# Altium PCB Space_OUT.PcbDoc (part 2 of 3)
Units mm, origin at the board's own origin, x right, y up, seen from the top; angles counter-clockwise.
Board outline 300 x 100 mm, 4 copper layers (Top Layer, MidLayer1, MidLayer2, Bottom Layer); 157 components, 49 nets, 745 pads, 302 vias.
Unrouted connection lines stored in the file: 3.
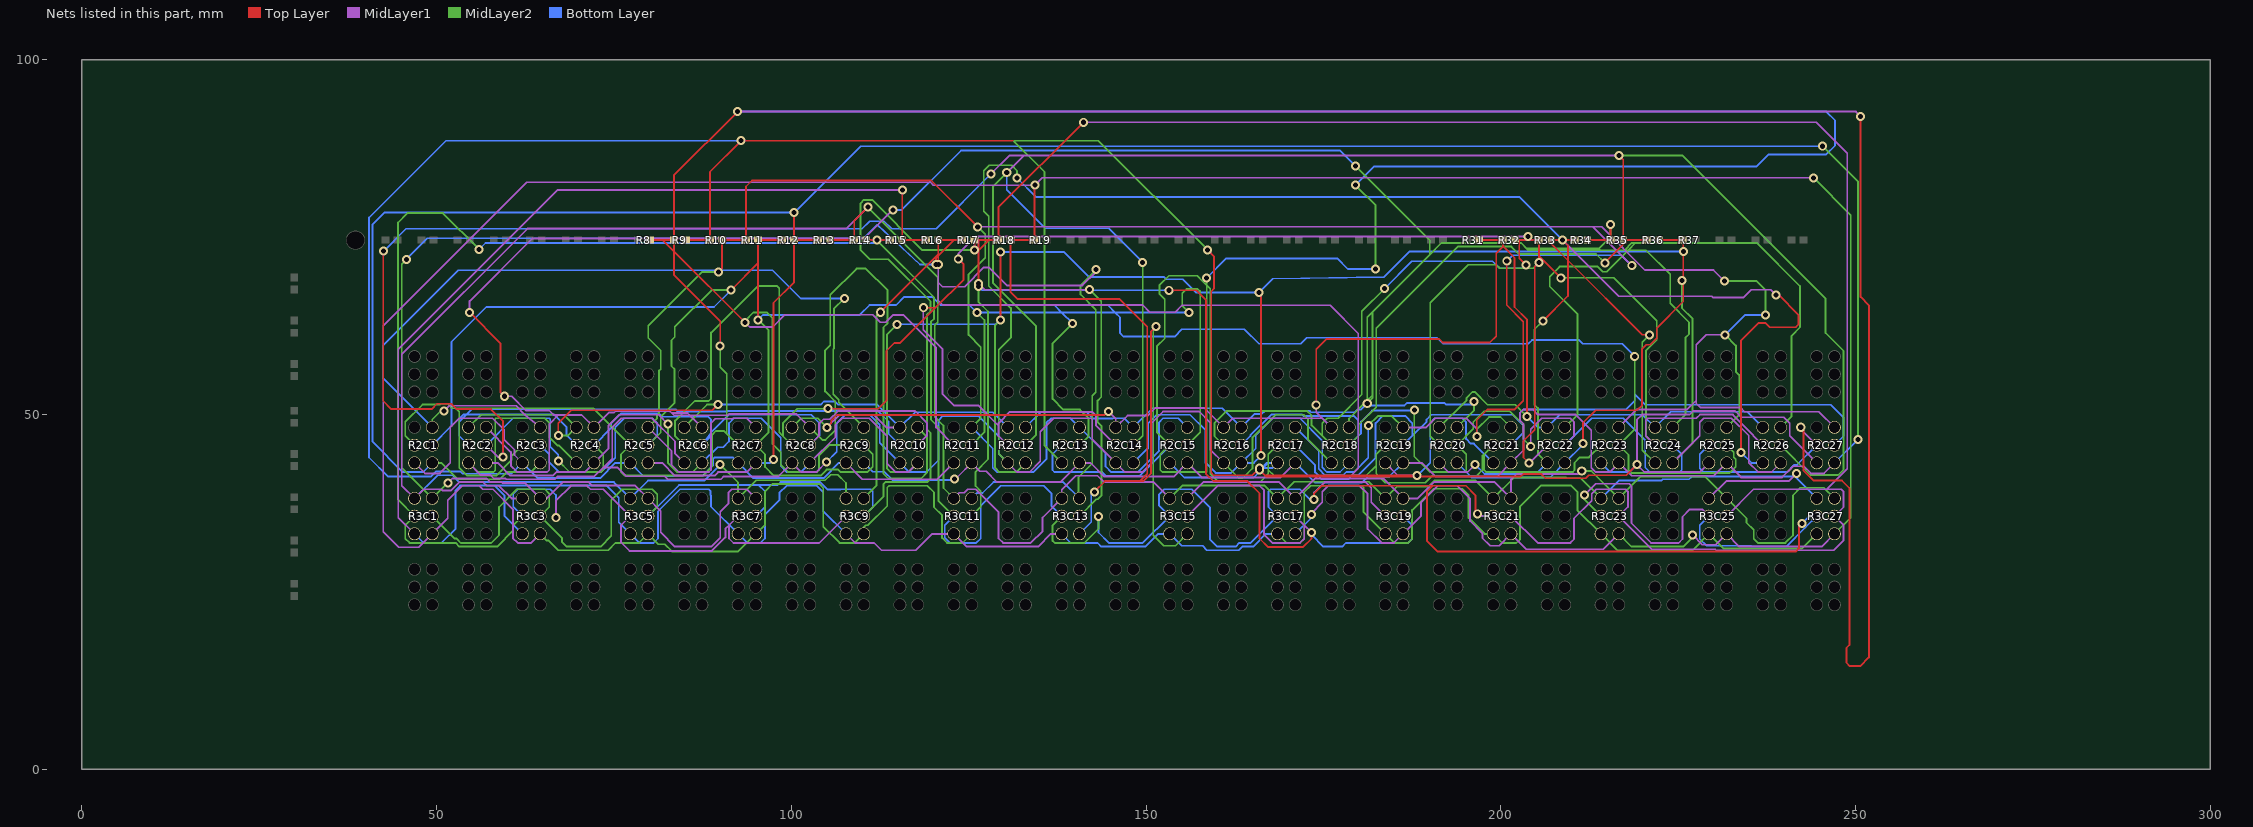
[diagram p4: the nets of this part, all layers, seen from the top]

## Via types
v1: diameter 1.27, hole 0.711, Top Layer to Bottom Layer, 302 vias

## Nets (pads, with @x,y where several pads share a name; then routed paths per layer and width w, separated by ;. In a path a pad name is that pad's centre, name@x,y a point inside that pad or via, vN(x,y) a via of type N, cw(c..) or ccw(c..) an arc to the next point about the centre after c; other vN are vias at no path point) (continued)
NetR2C1_2: R2C1.2 R2C3.2 R2C5.2 R2C7.2 R2C9.2 R2C11.2 R2C13.2 R2C15.2 R2C17.2 R2C19.2 R2C21.2 R2C23.2 R2C25.2 R2C27.2 R8.2 R9.2 | length 1033.7
  Top Layer w0.254: v1(89.992,59.665) 89.992,63.146 83.478,69.66 83.478,72.986 ; v1(92.456,92.659) 83.478,83.681 R9.2@83.478,74.549 ; v1(242.265,48.184) 242.67,47.779 242.67,42.064 244.069,40.665 248.082,40.665 249.123,39.624 249.123,17.501 248.717,17.094 248.717,14.986 249.174,14.529 250.647,14.529 251.866,15.748 251.866,65.38 250.698,66.548 v1(250.698,91.999) ; 81.915,74.549 83.478,72.986 ; 81.915,74.549 R9.2@83.478,74.549 ; 81.915,74.549 R8.2@80.098,74.549 81.915,74.549 ; 83.478,72.986 v1(93.523,62.941) 83.478,72.986 ; 83.478,72.986 R9.2@83.478,74.549 ; 83.478,72.986 R9.2@83.478,74.549
  MidLayer1 w0.254: v1(92.456,92.659) 250.038,92.659 v1(250.698,91.999) ; v1(93.523,62.941) 94.158,62.306 97.384,62.306 99.111,64.033 111.488,64.033 112.529,62.992 113.342,62.992 114.358,64.008 115.78,64.008 120.421,59.367 120.421,48.164 R2C11.2@122.924,45.661 ; v1(242.265,48.184) 242.265,47.92 R2C27.2@244.524,45.661
  MidLayer2 w0.254: R2C1.2@46.924,45.661 45.618,46.967 45.618,48.946 48.045,51.372 50.5,51.372 50.614,51.486 51.605,51.486 52.227,50.864 ; R2C3.2@62.124,45.661 60.63,44.167 60.63,43.582 58.42,41.372 54.356,41.372 53.238,42.49 53.238,50.368 52.743,50.864 ; v1(89.992,59.665) 89.992,56.632 90.922,55.703 90.922,47.263 ; v1(93.523,62.941) 93.523,63.195 94.691,64.364 96.571,64.364 97.333,63.602 97.333,45.851 98.527,44.657 98.527,42.921 99.568,41.88 103.632,41.88 103.905,42.153 103.905,44.196 105.37,45.661 R2C9.2@107.724,45.661 ; v1(158.547,69.215) 158.547,68.195 ; R2C17.2@168.524,45.661 167.234,44.371 ; v1(179.502,82.296) 182.347,79.451 v1(182.347,70.485) ; R2C19.2@183.724,45.661 182.433,44.37 ; R2C23.2@214.124,45.661 212.405,43.942 211.15,43.942 210.388,43.18 210.388,42.139 210.109,41.859 197.942,41.859 197.637,42.164 197.637,44.374 ; 52.227,50.864 52.743,50.864 ; 52.227,50.864 52.743,50.864 ; 52.743,50.864 72.121,50.864 R2C5.2@77.324,45.661 76.022,44.359 76.022,41.859 76.509,41.372 87.575,41.372 88.875,42.672 88.875,47.142 89.408,47.676 90.509,47.676 90.922,47.263 ; 90.922,47.263 R2C7.2@92.524,45.661 90.922,47.263 ; 158.547,68.195 158.037,68.705 157.197,69.545 153.238,69.545 151.892,68.199 151.892,66.98 152.629,66.243 152.629,60.687 151.535,59.593 151.535,47.45 R2C15.2@153.324,45.661 152.019,44.356 152.019,42.164 152.324,41.859 158.471,41.859 158.547,41.935 158.547,68.195 ; 158.547,68.195 159.055,67.687 159.055,41.656 160.249,40.462 166.065,40.462 167.234,41.631 167.234,42.164 ; 167.234,42.164 168.046,41.351 181,41.351 182.433,42.783 ; 167.234,42.164 167.234,44.371 ; 167.234,42.164 167.234,44.371 ; 182.433,42.783 182.433,44.37 ; 182.433,42.783 182.433,41.646 183.718,40.361 189.324,40.361 190.264,41.3 196.545,41.3 197.409,42.164 197.409,44.146 197.637,44.374 ; 182.433,42.783 182.433,44.37 ; 197.637,44.374 R2C21.2@198.924,45.661 197.637,44.374
  Bottom Layer w0.254: v1(92.456,92.659) 245.872,92.659 247.091,91.44 247.091,87.859 245.872,86.639 237.744,86.639 236.017,84.912 182.118,84.912 v1(179.502,82.296) ; R2C13.2@138.124,45.661 136.83,44.367 136.83,42.164 137.135,41.859 143.815,41.859 144.323,41.351 149.123,41.351 152.705,44.933 152.705,45.661 R2C15.2@153.324,45.661 ; v1(158.547,69.215) 161.315,71.984 176.936,71.984 178.435,70.485 v1(182.347,70.485) ; R2C25.2@229.324,45.661 228.041,44.378 228.041,42.418 228.6,41.859 240.36,41.859 241.372,42.871 241.734,42.871 R2C27.2@244.524,45.661
NetR2C1_3: R2C1.3 R2C3.3 R2C5.3 R2C7.3 R2C9.3 R2C11.3 R2C13.3 R2C15.3 R2C17.3 R2C19.3 R2C21.3 R2C23.3 R2C25.3 R2C27.3 R9.1 R10.1 | length 568
  Top Layer w0.254: R9.1@85.178,74.549 R10.1@88.558,74.549 88.558,84.189 v1(92.939,88.57) 131.293,88.57 ; v1(158.674,73.177) 159.563,72.288 159.563,67.691 159.182,67.31 159.182,41.758 159.512,41.427 164.998,41.427 165.862,42.291 v1(166.014,42.443) ; v1(188.214,41.377) 166.776,41.377 ; v1(219.177,42.926) 217.678,41.427 212.42,41.427 211.988,40.996 206.299,40.996 205.715,41.58 203.149,41.58 202.819,41.25 188.214,41.25 166.903,41.25 166.776,41.377 ; 166.776,41.377 v1(166.014,42.139) 166.776,41.377
  MidLayer1 w0.254: R2C1.3@46.924,43.161 48.404,41.681 50.495,41.681 51.968,43.155 51.968,48.184 53.238,49.454 57.912,49.454 59.563,47.803 59.563,46.431 61.011,44.983 61.011,44.274 R2C3.3@62.124,43.161 ; R2C9.3@107.724,43.161 110.042,40.843 120.606,40.843 R2C11.3@122.924,43.161 ; R2C19.3@183.724,43.161 185.508,41.377 v1(188.214,41.377) ; R2C25.3@229.324,43.161 228.022,41.859 220.243,41.859 v1(219.177,42.926) 219.177,49.225 219.913,49.962 226.593,49.962 227.101,50.47 233.02,50.47 233.883,49.606 239.878,49.606 240.716,48.768 240.716,46.969 R2C27.3@244.524,43.161
  MidLayer2 w0.254: R2C13.3@138.124,43.161 135.712,45.573 135.712,84.15 131.293,88.57 143.281,88.57 v1(158.674,73.177)
  Bottom Layer w0.254: v1(92.939,88.57) 51.359,88.57 40.513,77.724 40.513,43.917 43.205,41.224 49.2,41.224 49.911,41.935 53.416,41.935 53.721,41.631 60.594,41.631 R2C3.3@62.124,43.161 64.264,41.021 73.076,41.021 75.216,43.161 R2C5.3@77.324,43.161 79.185,41.3 87.485,41.3 88.976,42.792 88.976,43.688 89.23,43.942 91.743,43.942 R2C7.3@92.524,43.161 94.664,41.021 104.591,41.021 106.731,43.161 R2C9.3@107.724,43.161 ; R2C15.3@153.324,43.161 155.388,41.097 165.17,41.097 166.113,42.04 166.265,42.193 v1@166.516,42.443 ; v1(166.014,42.139) 166.167,42.291 v1@166.319,42.443 ; v1(166.014,42.443) v1@166.319,42.443 ; v1(188.214,41.377) 190.043,43.206 190.043,48.768 190.717,49.442 194.564,49.442 195.105,48.901 195.105,46.545 195.778,45.872 196.213,45.872 R2C21.3@198.924,43.161 ; R2C23.3@214.124,43.161 215.426,41.859 218.11,41.859 v1(219.177,42.926) ; v1@166.319,42.443 v1@166.516,42.443 ; v1@166.319,42.443 167.037,43.161 167.234,43.161 ; v1@166.516,42.443 167.806,42.443 R2C17.3@168.524,43.161 ; v1@166.516,42.443 167.234,43.161 ; 167.234,43.161 R2C17.3@168.524,43.161 ; 167.234,43.161 R2C17.3@168.524,43.161
NetR2C1_4: R2C1.4 R2C3.4 R2C5.4 R2C7.4 R2C9.4 R2C11.4 R2C13.4 R2C15.4 R2C17.4 R2C19.4 R2C21.4 R2C23.4 R2C25.4 R2C27.4 R10.2 R11.2 | length 733.4
  Top Layer w0.254: v1(89.75,70.053) 90.258,70.561 R10.2@90.258,74.549 R11.2@93.638,74.549 93.638,82.106 94.488,82.956 119.761,82.956 v1(126.289,76.429) ; v1(196.621,46.888) 196.621,49.2 198.12,50.698 201.955,50.698 203.175,51.918 203.175,63.068 200.838,65.405 v1(200.838,71.603)
  MidLayer1 w0.254: v1(51.105,50.47) 51.841,51.206 61.232,51.206 62.477,49.962 R2C3.4@64.624,48.161 ; R2C5.4@79.824,48.161 83.134,44.851 83.134,42.926 84.18,41.88 88.421,41.88 88.705,42.164 88.705,48.768 89.315,49.378 91.729,49.378 91.805,49.454 93.731,49.454 R2C7.4@95.024,48.161 ; R2C19.4@186.224,48.161 189.483,48.161 190.776,49.454 195.148,49.454 196.621,47.981 v1(196.621,46.888) ; R2C23.4@216.624,48.161 219.155,50.692 226.278,50.692 227.535,51.949 ; v1(218.453,70.955) 212.979,76.429 ; v1(231.521,68.783) 229.972,70.333 220.32,70.333 214.224,76.429 212.979,76.429 ; v1(231.597,61.214) 228.93,61.214 227.535,59.819 ; R2C27.4@247.024,48.161 244.829,50.356 234.335,50.356 233.713,50.978 228.092,50.978 227.535,51.535 227.535,51.949 ; 212.979,76.429 v1(126.289,76.429) 212.979,76.429 ; 227.535,51.949 227.535,59.819 ; 227.535,51.949 227.535,59.819
  MidLayer2 w0.254: R2C1.4@49.424,48.161 49.424,49.276 50.618,50.47 v1(51.105,50.47) ; R2C5.4@79.824,48.161 81.102,49.439 81.102,49.91 81.358,50.166 81.358,56.117 81.613,56.372 81.613,59.001 79.858,60.757 79.858,62.484 87.427,70.053 v1(89.75,70.053) ; v1(107.493,66.33) 106.02,64.857 106.02,59.237 105.935,59.152 105.935,52.832 106.705,52.062 106.705,51.68 R2C9.4@110.224,48.161 ; R2C11.4@125.424,48.161 126.721,49.458 126.721,59.461 124.993,61.189 124.993,69.723 127.342,72.072 127.342,75.375 v1(126.289,76.429) ; v1(181.331,48.438) 182.651,49.759 184.626,49.759 R2C19.4@186.224,48.161 ; v1(196.621,46.888) 196.621,47.904 198.349,49.632 199.953,49.632 R2C21.4@201.424,48.161 ; v1(231.521,68.783) 236.042,68.783 237.287,67.539 v1(237.287,63.983) ; v1(231.597,61.214) 233.121,59.69 233.121,56.02 233.613,55.529 233.613,49.95 R2C25.4@231.824,48.161
  Bottom Layer w0.254: R2C1.4@49.424,48.161 42.506,55.079 42.506,59.753 53.061,70.307 ; v1(89.75,70.053) v1@89.75,70.307 ; v1(107.493,66.33) 101.34,66.33 97.363,70.307 v1@89.75,70.307 ; R2C11.4@125.424,48.161 128.397,45.188 128.397,42.494 129.032,41.859 134.137,41.859 135.966,43.688 135.966,48.793 136.627,49.454 139.331,49.454 R2C13.4@140.624,48.161 144.297,44.488 144.297,42.672 145.11,41.859 148.844,41.859 151.841,44.856 151.841,48.883 152.4,49.442 154.543,49.442 R2C15.4@155.824,48.161 ; R2C17.4@171.024,48.161 174.335,44.85 174.335,42.314 175.277,41.372 177.719,41.372 178.227,41.88 179.324,41.88 181.331,43.887 v1(181.331,48.438) ; v1(200.838,71.603) 201.664,72.429 216.979,72.429 v1(218.453,70.955) ; v1(231.597,61.214) 234.366,63.983 v1(237.287,63.983) ; 53.061,70.307 v1@89.75,70.307 ; 53.061,70.307 v1@89.75,70.307
NetR2C1_5: R2C1.5 R2C3.5 R2C5.5 R2C7.5 R2C9.5 R2C11.5 R2C13.5 R2C15.5 R2C17.5 R2C19.5 R2C21.5 R2C23.5 R2C25.5 R2C27.5 R11.1 R12.1 | length 587.7
  Top Layer w0.254: v1(91.516,67.513) 95.338,71.335 ; v1(95.338,63.322) 95.338,71.335 ; R12.1@98.718,74.549 R11.1@95.338,74.549 ; 95.338,71.335 R11.1@95.338,74.549 ; 95.338,71.335 R11.1@95.338,74.549
  MidLayer2 w0.254: R2C5.5@79.824,45.661 81.61,47.447 81.61,49.658 83.566,51.614 83.566,56.372 83.135,56.803 83.135,60.449 83.591,60.905 83.591,62.319 88.786,67.513 v1(91.516,67.513) ; v1(95.338,63.322) 96.813,61.847 96.813,47.45 R2C7.5@95.024,45.661 96.316,44.369 96.316,42.592 97.536,41.372 104.14,41.372 104.983,42.215 106.645,42.215 107.001,41.859 110.744,41.859 111.506,42.621 111.506,44.379 R2C9.5@110.224,45.661 ; R2C11.5@125.424,45.661 127.229,47.466 127.229,63.297 v1(126.187,64.338) ; v1(139.649,62.814) 136.843,60.008 136.843,52.184 138.354,50.673 140.686,50.673 141.905,49.454 141.905,46.942 R2C13.5@140.624,45.661 ; R2C15.5@155.824,45.661 157.632,47.469 157.632,67.335 157.302,67.666 155.727,67.666 155.118,67.056 155.118,65.303 v1(156.083,64.338) ; 218.872,52.832 218.872,47.909 ; v1(218.872,58.166) 218.872,47.909 ; R2C25.5@231.824,45.661 232.816,44.669 232.816,43.98 233.105,43.692 233.105,42.63 232.232,41.758 218.415,41.758 218.008,42.164 218.008,44.277 R2C23.5@216.624,45.661 218.872,47.909
  Bottom Layer w0.254: R2C1.5@49.424,45.661 52.121,48.358 52.121,60.198 57.048,65.126 89.129,65.126 v1(91.516,67.513) ; R2C3.5@64.624,45.661 65.913,44.372 65.913,43.256 67.31,41.859 73.196,41.859 75.209,43.873 75.209,48.209 76.454,49.454 80.442,49.454 81.128,48.768 81.128,46.965 R2C5.5@79.824,45.661 ; v1(95.338,63.322) 96.024,64.008 109.652,64.008 111.049,65.405 114.808,65.405 115.951,66.548 119.888,66.548 121.031,65.405 ; v1(139.649,62.814) 138.125,64.338 ; v1(156.083,64.338) 145.669,64.338 ; R2C17.5@171.024,45.661 173.827,42.858 173.827,41.815 174.778,40.864 178.521,40.864 179.029,41.372 179.832,41.372 182.347,43.887 182.347,48.768 183.363,49.784 186.512,49.784 187.528,48.768 187.528,46.965 ; R2C21.5@201.424,45.661 203.144,47.381 203.144,48.482 ; v1(218.872,58.166) 217.088,59.95 211.569,59.95 211.061,60.458 204.399,60.458 203.891,59.95 191.848,59.95 191.008,60.79 172.637,60.79 171.797,59.95 165.921,59.95 163.869,62.001 155.067,62.001 154.032,60.966 146.831,60.966 146.355,61.443 146.355,63.652 145.669,64.338 ; R2C27.5@247.024,45.661 248.31,46.947 248.31,49.53 246.485,51.355 220.348,51.355 218.872,52.832 218.872,51.918 217.653,50.698 203.2,50.698 202.692,50.19 202.692,48.934 ; 121.031,65.405 125.12,65.405 ; 121.031,65.405 125.12,65.405 ; 121.031,65.405 125.12,65.405 ; 125.12,65.405 137.058,65.405 ; 125.12,65.405 137.058,65.405 ; 125.12,65.405 v1(126.187,64.338) 138.125,64.338 ; 137.058,65.405 144.602,65.405 145.669,64.338 ; 137.058,65.405 138.125,64.338 ; 138.125,64.338 145.669,64.338 ; 187.528,46.965 189.535,48.972 189.535,49.276 190.209,49.95 201.676,49.95 202.692,48.934 ; 187.528,46.965 R2C19.5@186.224,45.661 187.528,46.965 ; 202.692,48.934 203.144,48.482 ; 202.692,48.934 203.144,48.482
NetR2C1_6: R2C1.6 R2C3.6 R2C5.6 R2C7.6 R2C9.6 R2C11.6 R2C13.6 R2C15.6 R2C17.6 R2C19.6 R2C21.6 R2C23.6 R2C25.6 R2C27.6 R12.2 R13.2 | length 540.7
  Top Layer w0.254: v1(97.511,43.637) 97.511,65.735 100.418,68.643 R12.2@100.418,74.549 ; v1@100.418,78.435 v1(100.418,78.422) R12.2@100.418,74.549 ; R13.2@103.798,74.549 R12.2@100.418,74.549
  MidLayer1 w0.254: R2C5.6@79.824,43.161 81.833,43.161 83.622,41.372 89.213,41.372 89.7,41.859 93.722,41.859 R2C7.6@95.024,43.161 ; v1(122.987,40.919) 123.241,41.173 123.436,41.173 R2C11.6@125.424,43.161 126.599,41.986 127.475,41.986 128.999,40.462 137.925,40.462 R2C13.6@140.624,43.161 142.183,43.161 144.12,41.224 153.887,41.224 R2C15.6@155.824,43.161 157.862,41.123 168.986,41.123 R2C17.6@171.024,43.161 ; R2C19.6@186.224,43.161 188.893,43.161 190.83,41.224 199.487,41.224 R2C21.6@201.424,43.161 203.2,44.937 203.2,48.666 202.692,49.174 202.692,50.19 203.2,50.698 204.495,50.698 205.232,49.962 210.566,49.962 212.75,47.777 212.75,42.469 213.36,41.859 215.322,41.859 R2C23.6@216.624,43.161 218.434,41.351 230.014,41.351 R2C25.6@231.824,43.161 233.862,41.123 239.624,41.123 241.198,42.697 242.697,42.697 243.713,41.681 245.544,41.681 R2C27.6@247.024,43.161
  MidLayer2 w0.254: R2C1.6@49.424,43.161 50.692,43.161 53.01,40.843 58.928,40.843 59.944,41.859 63.322,41.859 R2C3.6@64.624,43.161 ; v1(245.339,87.782) 250.342,82.779 v1(250.342,46.479)
  Bottom Layer w0.254: R2C1.6@49.424,43.161 48.122,41.859 45.288,41.859 41.021,46.126 41.021,76.784 42.672,78.435 v1@100.418,78.435 ; R2C7.6@95.024,43.161 97.034,43.161 v1(97.511,43.637) ; v1(100.418,78.422) 109.779,87.782 v1(245.339,87.782) ; R2C9.6@110.224,43.161 111.475,41.91 113.132,41.91 114.287,40.754 122.822,40.754 v1(122.987,40.919) ; R2C17.6@171.024,43.161 173.829,40.356 180.413,40.356 181.307,41.25 184.313,41.25 R2C19.6@186.224,43.161 ; R2C27.6@247.024,43.161 v1(250.342,46.479)
NetR2C2_1: R2C2.1 R2C4.1 R2C6.1 R2C8.1 R2C10.1 R2C12.1 R2C14.1 R2C16.1 R2C18.1 R2C20.1 R2C22.1 R2C24.1 R2C26.1 R31.1 R32.2 | length 325.3
  Top Layer w0.254: v1(67.183,47.03) 67.183,48.768 68.986,50.571 88.858,50.571 v1(89.697,51.41) ; v1(105.029,48.158) 105.639,48.768 105.639,49.124 106.426,49.911 144.2,49.911 v1(144.708,50.419) ; v1(173.99,51.308) 173.99,59.157 175.463,60.63 191.284,60.63 191.792,60.122 198.45,60.122 199.343,61.014 199.343,72.685 200.318,73.66 ; R31.1@196.938,74.549 R32.2@200.318,74.549 200.318,73.66 ; v1(203.708,49.682) 203.708,63.351 201.931,65.128 201.931,72.047 200.318,73.66
  MidLayer1 w0.254: v1(105.029,48.158) 106.821,49.95 111.613,49.95 113.402,48.161 R2C10.1@115.324,48.161 ; v1(144.708,50.419) 145.724,49.403 R2C14.1@145.724,48.161 147.391,49.828 150.252,49.828 151.339,50.914 158.171,50.914 R2C16.1@160.924,48.161 162.214,49.451 174.834,49.451 ; v1(173.99,51.308) 173.99,50.295 174.834,49.451 ; 174.834,49.451 R2C18.1@176.124,48.161 174.834,49.451
  MidLayer2 w0.254: R2C2.1@54.524,48.161 56.313,49.95 67.935,49.95 R2C4.1@69.724,48.161 68.593,47.03 v1(67.183,47.03) ; R2C6.1@84.924,48.161 88.135,51.372 v1@89.189,51.372 ; R2C8.1@100.124,48.161 101.417,49.454 103.734,49.454 v1(105.029,48.158) ; R2C20.1@191.324,48.161 195.174,52.011 195.174,52.324 196.011,53.161 196.318,53.161 198.12,51.359 202.032,51.359 v1(203.708,49.682) ; v1@89.189,51.372 v1(89.697,51.41) 89.226,51.41 v1@89.189,51.372
  Bottom Layer w0.254: v1(89.697,51.41) 89.734,51.372 104.165,51.372 104.609,51.816 106.197,51.816 106.641,51.372 112.113,51.372 R2C10.1@115.324,48.161 117.459,50.296 128.389,50.296 R2C12.1@130.524,48.161 ; v1(203.708,49.682) 205.229,48.161 R2C22.1@206.524,48.161 208.313,49.95 219.935,49.95 R2C24.1@221.724,48.161 223.931,50.368 234.717,50.368 R2C26.1@236.924,48.161
NetR2C2_2: R2C2.2 R2C4.2 R2C6.2 R2C8.2 R2C10.2 R2C12.2 R2C14.2 R2C16.2 R2C18.2 R2C20.2 R2C22.2 R2C24.2 R2C26.2 R32.1 R33.2 | length 557.5
  Top Layer w0.254: v1(105.181,50.8) 112.268,50.8 113.411,51.943 113.411,58.928 114.554,60.071 115.367,60.071 120.32,65.024 ; v1(118.618,65.024) 120.32,65.024 ; v1(123.546,71.907) 124.294,71.159 124.294,68.998 ; v1(203.533,71.069) 202.607,71.995 202.607,74.549 ; v1(203.835,75.082) 204.368,74.549 ; v1(203.99,43.127) 203.2,43.917 203.2,46.279 204.775,47.854 204.775,70.79 v1(205.398,71.413) 205.398,72.288 ; v1(208.446,69.24) 205.836,71.851 205.398,72.288 ; 120.32,65.024 124.294,68.998 ; 120.32,65.024 124.294,68.998 ; 202.607,74.549 203.835,74.549 204.368,74.549 ; 202.607,74.549 R32.1@202.018,74.549 202.607,74.549 ; 204.368,74.549 R33.2@205.398,74.549 ; 204.368,74.549 R33.2@205.398,74.549 ; 205.398,72.288 R33.2@205.398,74.549 ; 205.398,72.288 R33.2@205.398,74.549
  MidLayer1 w0.254: v1(118.618,65.024) 118.618,61.9 121.336,59.182 121.336,52.832 122.911,51.257 126.34,51.257 129.235,48.362 ; v1(123.546,71.907) 123.546,72.644 125.984,75.082 v1(203.835,75.082) ; R2C12.2@130.524,45.661 129.235,46.95 ; R2C14.2@145.724,45.661 142.975,48.41 142.975,49.784 142.416,50.343 130.81,50.343 129.235,48.768 129.235,48.362 ; v1(203.99,43.127) R2C22.2@206.524,45.661 ; R2C24.2@221.724,45.661 220.421,46.964 220.421,49.174 220.701,49.454 227.561,49.454 228.069,49.962 232.697,49.962 235.585,47.073 235.585,47 R2C26.2@236.924,45.661 ; 129.235,46.95 129.235,48.362 ; 129.235,46.95 129.235,48.362
  MidLayer2 w0.254: R2C6.2@84.924,45.661 83.643,46.942 83.643,49.124 86.399,51.88 88.392,51.88 88.722,52.21 88.722,61.519 95.275,68.072 98.019,68.072 98.323,67.767 98.323,47.462 98.831,46.954 ; v1(105.181,50.8) 100.863,50.8 98.831,48.768 98.831,46.954 ; R2C16.2@160.924,45.661 159.639,46.946 159.639,48.768 161.329,50.458 172.72,50.458 173.338,49.84 173.338,48.447 174.828,46.957 ; R2C18.2@176.124,45.661 174.828,46.957 ; v1(183.604,67.716) 180.413,64.525 180.413,52.803 177.063,49.454 175.514,49.454 174.828,48.768 174.828,46.957 ; R2C20.2@191.324,45.661 190.043,46.942 190.043,65.735 195.402,71.095 199.314,71.095 199.822,70.587 203.533,70.587 204.572,70.587 v1(205.398,71.413) ; v1(208.446,69.24) 215.903,69.24 221.967,63.176 221.967,60.474 220.443,58.95 220.443,46.942 R2C24.2@221.724,45.661 ; 98.831,46.954 R2C8.2@100.124,45.661 98.831,46.954
  Bottom Layer w0.254: R2C2.2@54.524,45.661 53.238,46.947 ; R2C4.2@69.724,45.661 68.357,47.028 68.357,48.21 66.605,49.962 54.229,49.962 ; v1(105.181,50.8) 111.912,50.8 112.254,50.458 ; R2C10.2@115.324,45.661 113.716,47.269 113.716,48.997 ; v1(183.604,67.716) 187.465,71.577 198.831,71.577 199.822,70.587 203.05,70.587 v1(203.533,71.069) ; 53.238,46.947 53.238,48.971 ; 53.238,46.947 53.238,48.971 ; 53.238,48.971 54.229,49.962 ; 53.238,48.971 53.238,49.403 53.797,49.962 54.229,49.962 ; 54.229,49.962 54.991,50.724 83.714,50.724 84.044,50.394 90.957,50.394 91.022,50.458 105.181,50.458 112.254,50.458 ; 112.254,50.458 113.716,48.997 ; 112.254,50.458 113.716,48.997
NetR2C2_3: R2C2.3 R2C4.3 R2C6.3 R2C8.3 R2C10.3 R2C12.3 R2C14.3 R2C16.3 R2C18.3 R2C20.3 R2C22.3 R2C24.3 R2C26.3 R33.1 R34.2 | length 524.1
  Top Layer w0.254: v1(205.918,63.144) 209.462,66.689 209.462,71.678 ; R34.2@210.478,74.549 v1(208.712,74.549) ; v1(220.951,61.205) 219.935,61.205 209.462,71.678 ; v1(233.832,44.653) 233.832,60.379 236.344,62.89 237.261,62.89 237.871,62.281 241.554,62.281 241.935,62.662 241.935,64.043 239.15,66.827 v1(238.785,66.827) ; v1(208.712,74.549) R33.1@207.098,74.549 207.098,74.042 209.462,71.678 ; v1(208.712,74.549) 209.462,73.799 209.462,71.678
  MidLayer1 w0.254: R2C2.3@54.524,43.161 56.211,41.474 57.585,41.474 58.093,40.966 59.727,40.966 59.829,40.864 66.721,40.864 67.107,41.25 72.263,41.25 ; R2C6.3@84.924,43.161 83.642,44.443 83.642,46.177 80.377,49.442 76.048,49.442 74.778,48.172 74.778,43.764 73.508,42.494 ; v1(104.978,43.282) 103.556,41.859 101.426,41.859 R2C8.3@100.124,43.161 98.213,41.25 90.492,41.25 90.107,40.864 82.627,40.864 82.202,41.289 76.753,41.289 75.547,42.494 73.508,42.494 ; R2C12.3@130.524,43.161 131.805,41.88 133.604,41.88 135.088,43.364 135.088,47.559 136.982,49.454 142.235,49.454 142.413,49.276 142.413,46.472 R2C14.3@145.724,43.161 147.005,41.88 149.5,41.88 150.774,43.155 150.774,48.768 152.413,50.406 157.486,50.406 159.075,48.817 159.075,45.01 R2C16.3@160.924,43.161 ; R2C20.3@191.324,43.161 192.605,41.88 195.347,41.88 v1(196.393,42.926) ; v1(208.712,74.549) 216.609,66.651 229.729,66.651 229.921,66.46 234.188,66.46 235.279,67.551 238.062,67.551 v1(238.785,66.827) ; 72.263,41.25 73.508,42.494 ; 72.263,41.25 73.508,42.494
  MidLayer2 w0.254: R2C2.3@54.524,43.161 55.805,41.88 58.069,41.88 58.305,42.116 58.305,49.403 58.344,49.442 65.29,49.442 65.964,48.768 65.964,46.711 67.056,45.618 67.267,45.618 R2C4.3@69.724,43.161 ; R2C12.3@130.524,43.161 129.243,44.442 129.243,59.096 130.962,60.815 130.962,64.973 127.85,68.086 127.85,77.915 127.127,78.638 127.127,84.328 127.889,85.09 131.064,85.09 131.826,84.328 v1(131.826,83.312) ; R2C16.3@160.924,43.161 163.039,41.046 163.678,41.046 164.998,42.367 164.998,46.685 168.263,49.95 172.212,49.95 172.813,49.349 172.813,46.472 R2C18.3@176.124,43.161 ; v1(205.918,63.144) 204.735,61.962 204.735,51.372 205.232,50.875 205.232,44.453 R2C22.3@206.524,43.161 ; v1(220.951,61.205) 219.935,60.189 219.935,44.95 R2C24.3@221.724,43.161
  Bottom Layer w0.254: v1(104.978,43.282) 106.426,44.729 106.426,48.768 107.608,49.95 111.053,49.95 112.477,48.526 112.477,46.008 R2C10.3@115.324,43.161 116.616,41.869 119.073,41.869 120.776,43.573 120.776,49.189 121.375,49.788 126.35,49.788 129.243,46.894 129.243,44.442 R2C12.3@130.524,43.161 ; v1(131.826,83.312) 134.518,80.62 202.641,80.62 v1(208.712,74.549) ; v1(196.393,42.926) 197.703,41.616 204.979,41.616 R2C22.3@206.524,43.161 ; v1(233.832,44.653) 235.325,43.161 R2C26.3@236.924,43.161
NetR2C2_4: R2C2.4 R2C4.4 R2C6.4 R2C8.4 R2C10.4 R2C12.4 R2C14.4 R2C16.4 R2C18.4 R2C20.4 R2C22.4 R2C24.4 R2C26.4 R34.1 R35.2 | length 664.7
  Top Layer w0.254: v1(54.686,64.364) 59.03,60.02 59.03,53.111 v1(59.588,52.553) ; R34.1@212.178,74.549 R35.2@215.443,74.549 ; v1(215.443,76.784) R35.2@215.443,74.549 ; R35.2@215.443,74.549 R35.2@215.558,74.549 R35.2@215.443,74.549
  MidLayer1 w0.254: v1(54.686,64.364) 54.686,65.964 63.5,74.778 110.287,74.778 v1(114.325,78.816) ; R2C2.4@57.024,48.161 60.503,44.682 60.503,42.748 61.371,41.88 65.621,41.88 65.905,42.164 65.905,48.633 67.183,49.911 ; v1(59.588,52.553) 60.604,52.553 62.611,50.546 65.888,50.546 66.523,49.911 67.183,49.911 ; R2C6.4@87.424,48.161 85.699,49.886 ; R2C8.4@102.624,48.161 100.746,50.039 91.221,50.039 91.067,49.886 85.699,49.886 ; 67.183,49.911 70.474,49.911 ; 67.183,49.911 70.474,49.911 ; 70.474,49.911 R2C4.4@72.224,48.161 74.312,50.249 75.032,50.249 75.241,50.458 82.914,50.458 ; 82.914,50.458 83.182,50.19 ; 82.914,50.458 83.182,50.19 ; 83.182,50.19 85.395,50.19 85.699,49.886 ; 83.182,50.19 83.487,49.886 85.699,49.886
  MidLayer2 w0.254: R2C8.4@102.624,48.161 104.39,46.395 104.841,46.395 106.197,47.752 106.197,51.816 104.775,53.238 104.775,59.008 105.512,59.745 105.512,66.827 109.22,70.536 110.515,70.536 113.589,67.462 113.589,62.865 113.005,62.281 113.005,41.656 113.695,40.966 118.313,40.966 119.12,41.773 119.12,46.865 R2C10.4@117.824,48.161 ; R2C18.4@178.624,48.161 178.624,49.414 ; v1(179.553,84.988) 189.992,74.549 189.992,72.517 ; R2C20.4@193.824,48.161 196.24,50.577 v1(196.24,51.791) ; R2C22.4@209.024,48.161 210.82,49.957 210.82,64.084 206.883,68.021 206.883,69.418 208.28,70.815 213.639,70.815 214.351,70.104 214.909,70.104 217.944,73.139 ; v1(215.443,76.784) 215.443,74.981 213.817,73.355 203.657,73.355 ; R2C24.4@224.224,48.161 226.013,49.95 226.013,60.774 226.517,61.278 226.517,62.992 223.873,65.637 223.873,69.726 220.46,73.139 217.944,73.139 ; R2C26.4@239.424,48.161 240.97,49.707 240.97,61.087 242.164,62.281 242.164,68.072 236.068,74.168 ; 178.624,49.414 v1@180.772,51.562 ; 178.624,49.414 v1@180.772,51.562 ; v1@180.772,51.562 v1(181.178,51.562) ; v1@180.772,51.562 180.975,51.765 v1@181.178,51.968 ; v1(181.178,51.562) v1@181.178,51.968 ; v1(181.178,51.562) 181.935,52.319 181.935,52.725 ; v1@181.178,51.968 181.178,63.703 181.935,64.46 ; v1@181.178,51.968 181.935,52.725 ; 181.935,52.725 181.935,64.46 ; 181.935,52.725 181.935,64.46 ; 181.935,64.46 189.992,72.517 ; 181.935,64.46 189.992,72.517 ; 189.992,72.517 191.618,74.143 ; 189.992,72.517 191.618,74.143 ; 191.618,74.143 202.87,74.143 ; 202.87,74.143 203.657,73.355 ; 202.87,74.143 203.657,73.355 ; 203.657,73.355 217.436,73.139 ; 203.657,73.355 203.874,73.139 217.436,73.139 ; 217.436,73.139 218.465,74.168 218.973,74.168 ; 217.436,73.139 217.944,73.139 ; 217.944,73.139 218.973,74.168 ; 218.973,74.168 236.068,74.168 ; 218.973,74.168 236.068,74.168
  Bottom Layer w0.254: v1(114.325,78.816) 115.57,78.816 123.927,87.173 177.368,87.173 v1(179.553,84.988) ; R2C12.4@133.024,48.161 135.219,50.356 141.586,50.356 142.539,49.403 145.237,49.403 145.288,49.454 146.931,49.454 R2C14.4@148.224,48.161 150.914,50.851 160.734,50.851 R2C16.4@163.424,48.161 165.326,50.063 166.322,50.063 166.726,50.467 173.104,50.467 173.279,50.292 179.42,50.292 179.796,50.668 180.284,50.668 v1(181.178,51.562) 181.178,51.257 186.422,51.257 186.785,51.621 192.035,51.621 192.284,51.372 195.822,51.372 v1(196.24,51.791)
NetR2C2_5: R2C2.5 R2C4.5 R2C6.5 R2C8.5 R2C10.5 R2C12.5 R2C14.5 R2C16.5 R2C18.5 R2C20.5 R2C22.5 R2C24.5 R2C26.5 R35.1 R36.2 | length 768.3
  Top Layer w0.254: v1(42.57,73) 42.506,72.935 42.506,51.88 43.637,50.749 49.352,50.749 50.088,51.486 52.12,51.486 52.857,50.749 57.683,50.749 59.411,49.022 v1(59.411,43.96) ; v1(214.655,71.349) 217.258,73.951 R35.1@217.258,74.549 ; v1(216.662,86.462) 217.258,85.866 R35.1@217.258,74.549 ; R36.2@220.638,74.549 R35.1@217.258,74.549
  MidLayer1 w0.254: R2C2.5@57.024,45.661 58.725,43.96 v1(59.411,43.96) ; R2C8.5@102.624,45.661 103.911,46.948 103.911,48.666 104.553,49.308 105.46,49.308 106.622,50.47 117.475,50.47 119.126,48.819 119.126,46.963 R2C10.5@117.824,45.661 ; v1(128.143,83.871) 130.734,86.462 132.766,86.462 ; v1(130.378,84.074) 132.766,86.462 ; v1(204.216,45.466) 204.216,47.93 205.74,49.454 209.804,49.454 210.312,48.946 210.312,46.949 R2C22.5@209.024,45.661 ; 132.766,86.462 v1(216.662,86.462) 132.766,86.462
  MidLayer2 w0.254: v1(67.183,43.459) 68.762,41.88 73.221,41.88 73.505,42.164 73.505,44.38 R2C4.5@72.224,45.661 ; v1(130.378,84.074) 128.448,82.144 128.448,68.504 134.518,62.433 134.518,47.155 R2C12.5@133.024,45.661 ; R2C14.5@148.224,45.661 149.53,46.967 v1(149.53,71.425) ; R2C18.5@178.624,45.661 179.984,47.021 179.984,48.57 182.443,51.029 182.443,62.123 193.954,73.635 201.498,73.635 202.54,72.593 213.411,72.593 v1(214.655,71.349) ; v1(187.808,50.597) 187.808,44.064 189.992,41.88 194.843,41.88 195.123,42.159 195.123,44.362 R2C20.5@193.824,45.661 196.113,47.95 196.113,48.92 197.637,50.444 201.27,50.444 203.2,48.514 203.2,46.482 v1(204.216,45.466) ; v1(216.662,86.462) 225.628,86.462 245.77,66.319 245.77,61.463 248.305,58.928 248.305,42.235 247.514,41.444 243.641,41.444 R2C26.5@239.424,45.661
  Bottom Layer w0.254: v1(42.57,73) 45.72,76.149 109.982,76.149 111.049,77.216 113.081,77.216 114.148,76.149 120.421,76.149 v1(128.143,83.871) ; R2C2.5@57.024,45.661 60.805,49.442 65.913,49.442 66.04,49.315 66.04,45.426 67.183,44.283 v1(67.183,43.459) ; R2C4.5@72.224,45.661 74.651,48.088 74.651,48.768 76.048,50.165 81.315,50.165 81.822,49.658 88.315,49.658 88.722,49.251 88.722,47.452 ; R2C8.5@102.624,45.661 103.978,47.015 103.978,48.777 102.805,49.95 91.221,49.95 88.722,47.452 ; v1(130.378,84.074) 130.378,81.636 135.788,76.225 144.729,76.225 v1(149.53,71.425) ; R2C16.5@163.424,45.661 164.719,46.956 164.719,47.041 167.637,49.959 171.991,49.959 172.192,49.759 179.324,49.759 179.908,49.174 179.908,46.945 ; v1(187.808,50.597) 187.757,50.546 181.864,50.546 180.304,48.986 180.304,47.341 179.908,46.945 ; R2C22.5@209.024,45.661 212.805,49.442 217.233,49.442 220.345,46.33 220.345,42.515 220.98,41.88 225.221,41.88 225.505,42.164 225.505,44.38 R2C24.5@224.224,45.661 ; 88.722,47.452 88.722,46.959 R2C6.5@87.424,45.661 88.722,47.452 ; 179.908,46.945 R2C18.5@178.624,45.661 179.908,46.945
NetR2C2_6: R2C2.6 R2C4.6 R2C6.6 R2C8.6 R2C10.6 R2C12.6 R2C14.6 R2C16.6 R2C18.6 R2C20.6 R2C22.6 R2C24.6 R2C26.6 R36.1 R37.2 | length 471
  Top Layer w0.254: v1(129.489,63.322) v1(129.489,72.873) ; v1(165.938,67.183) 166.218,66.904 v1(166.218,44.171) ; v1(211.582,45.898) 211.582,48.793 213.36,50.571 219.177,50.571 219.913,51.308 219.913,59.258 220.472,59.817 221.078,59.817 221.967,60.706 221.967,62.153 225.718,65.904 225.718,68.859 v1@225.718,69.051 ; R36.1@222.338,74.549 R37.2@225.718,74.549 ; v1(225.527,68.859) v1@225.718,69.051 ; v1@225.718,69.051 v1(225.718,72.937) ; v1@225.718,69.051 v1(225.718,72.937) ; v1(225.718,72.937) R37.2@225.718,74.549 ; v1(225.718,72.937) R37.2@225.718,74.549 ; v1(225.718,72.937) R37.2@225.718,74.549
  MidLayer1 w0.254: R2C2.6@57.024,43.161 58.65,43.161 60.439,41.372 66.413,41.372 66.9,41.859 70.922,41.859 R2C4.6@72.224,43.161 74.27,45.207 74.27,48.438 75.782,49.95 81.317,49.95 v1(82.626,48.641) ; R2C8.6@102.624,43.161 106.248,46.785 106.248,48.497 107.193,49.442 110.998,49.442 113.529,46.911 113.529,43.063 114.733,41.859 116.522,41.859 R2C10.6@117.824,43.161 ; R2C24.6@224.224,43.161 228.041,46.978 228.041,48.883 228.6,49.442 232.498,49.442 234.925,47.015 234.925,43.205 236.25,41.88 238.143,41.88 R2C26.6@239.424,43.161
  MidLayer2 w0.254: v1(82.626,48.641) 82.626,43.155 83.901,41.88 86.143,41.88 R2C6.6@87.424,43.161 ; v1(114.935,62.687) 113.513,61.265 113.513,42.342 113.995,41.859 116.522,41.859 R2C10.6@117.824,43.161 ; v1(129.489,63.322) 128.727,62.56 128.727,42.469 129.337,41.859 131.722,41.859 R2C12.6@133.024,43.161 ; R2C24.6@224.224,43.161 227.025,45.962 227.025,63.451 225.527,64.95 v1(225.527,68.859)
  Bottom Layer w0.254: R2C6.6@87.424,43.161 89.637,45.374 90.424,45.374 91.243,46.193 91.243,48.768 91.917,49.442 95.77,49.442 98.527,46.685 98.527,42.723 99.39,41.859 101.322,41.859 R2C8.6@102.624,43.161 ; v1(114.935,62.687) 128.854,62.687 v1(129.489,63.322) ; v1(129.489,72.873) 138.455,72.873 141.961,69.367 152.502,69.367 152.832,69.037 155.169,69.037 157.023,67.183 v1(165.938,67.183) 167.869,69.113 183.553,69.367 187.123,72.937 v1(225.718,72.937) ; R2C14.6@148.224,43.161 150.266,45.203 150.266,48.681 151.535,49.95 156.196,49.95 158.394,47.752 158.394,43.155 159.801,41.748 162.011,41.748 R2C16.6@163.424,43.161 ; v1(166.218,44.171) 165.208,43.161 R2C16.6@163.424,43.161 ; R2C18.6@178.624,43.161 177.343,41.88 175.487,41.88 174.843,42.524 174.843,46.303 171.704,49.442 167.857,49.442 165.456,47.041 165.456,45.193 R2C16.6@163.424,43.161 ; R2C20.6@193.824,43.161 195.877,41.108 206.971,41.108 R2C22.6@209.024,43.161 211.582,45.719 v1(211.582,45.898)
NetR3C1_1: R3C1.1 R3C3.1 R3C5.1 R3C7.1 R3C9.1 R3C11.1 R3C13.1 R3C15.1 R3C17.1 R3C19.1 R3C21.1 R3C23.1 R3C25.1 R3C27.1 R13.1 R14.1 | length 400.2
  Top Layer w0.254: R13.1@105.498,74.549 R14.1@108.878,74.549 108.878,77.28 v1(110.795,79.197)
  MidLayer1 w0.254: R3C3.1@62.124,38.161 60.602,38.161 58.813,39.95 57.077,39.95 56.569,40.458 53.243,40.458 52.074,39.289 50.83,39.289 50.673,39.446 48.209,39.446 R3C1.1@46.924,38.161 45.135,39.95 45.135,58.47 62.84,76.175 107.772,76.175 v1(110.795,79.197) ; R3C11.1@122.924,38.161 123.712,38.949 124.395,38.949 124.892,39.446 125.984,39.446 129.235,36.195 129.235,32.512 129.867,31.88 133.759,31.88 135.433,33.553 135.433,35.47 R3C13.1@138.124,38.161 138.124,39.369 140.106,41.351 143.162,41.351 144.032,40.481 151.004,40.481 R3C15.1@153.324,38.161 ; R3C25.1@229.324,38.161 231.765,40.602 240.602,40.602 v1(241.681,41.681)
  MidLayer2 w0.254: v1(89.992,42.926) 92.524,40.394 R3C7.1@92.524,38.161 95.069,40.706 104.763,40.706 105.548,41.491 106.56,41.491 107.724,40.328 R3C9.1@107.724,38.161 ; v1(110.795,79.197) 120.65,69.342 120.65,62.992 120.218,62.56 120.218,49.661 121.463,48.416 121.463,39.622 R3C11.1@122.924,38.161 ; R3C15.1@153.324,38.161 155.117,39.954 166.731,39.954 R3C17.1@168.524,38.161 170.876,40.513 181.372,40.513 R3C19.1@183.724,38.161 185.416,39.853 189.832,39.853 190.696,40.716 196.369,40.716 R3C21.1@198.924,38.161 201.871,41.108 209.184,41.108 209.296,40.996 211.289,40.996 R3C23.1@214.124,38.161
  Bottom Layer w0.254: R3C1.1@46.924,38.161 50.19,41.427 52.284,41.427 53.249,40.462 75.023,40.462 R3C5.1@77.324,38.161 79.828,40.665 87.732,40.665 v1(89.992,42.926) ; R3C23.1@214.124,38.161 216.628,40.665 222.638,40.665 222.837,40.864 226.521,40.864 226.881,41.224 241.224,41.224 v1(241.681,41.681) 241.681,41.004 R3C27.1@244.524,38.161
NetR3C1_2: R3C1.2 R3C3.2 R3C5.2 R3C7.2 R3C9.2 R3C11.2 R3C13.2 R3C15.2 R3C17.2 R3C19.2 R3C21.2 R3C23.2 R3C25.2 R3C27.2 R14.2 R15.2 | length 526.5
  Top Layer w0.254: R14.2@110.578,74.549 v1(112.065,74.549) R15.2@113.958,74.549 ; v1(173.685,37.973) 173.685,38.862 174.752,39.929 190.398,39.929 ; v1(196.698,35.992) 196.418,36.271 196.418,38.608 195.097,39.929 ; v1(242.418,34.595) 242.011,34.188 242.011,31.115 241.554,30.658 191.11,30.658 189.586,32.182 189.586,39.116 190.398,39.929 ; 190.398,39.929 195.097,39.929 ; 190.398,39.929 195.097,39.929
  MidLayer1 w0.254: v1(66.853,35.433) 66.853,37.828 68.979,39.954 71.222,39.954 71.726,39.449 73.536,39.449 R3C5.2@77.324,35.661 76.022,34.359 76.022,31.953 77.216,30.759 88.831,30.759 90.729,32.657 90.729,33.866 91.237,34.374 ; R3C9.2@107.724,35.661 103.94,31.877 91.872,31.877 91.237,32.512 91.237,34.374 ; v1(173.685,37.973) 173.685,38.974 175.173,40.462 180.95,40.462 181.743,39.669 181.743,37.642 R3C19.2@183.724,35.661 ; v1(196.698,35.992) 197.028,35.661 R3C21.2@198.924,35.661 ; v1(211.811,38.659) 213.36,40.208 218.077,40.208 218.413,39.872 218.413,34.647 221.183,31.877 225.044,31.877 225.603,32.436 225.603,35.56 226.644,36.601 228.384,36.601 R3C25.2@229.324,35.661 ; 91.237,34.374 R3C7.2@92.524,35.661 91.237,34.374
  MidLayer2 w0.254: v1(56.032,73.254) 50.927,78.359 45.923,78.359 44.602,77.038 44.602,37.983 R3C1.2@46.924,35.661 45.618,34.355 45.618,32.49 46.228,31.88 52.705,31.88 53.216,31.369 58.557,31.369 60.833,33.645 60.833,34.37 R3C3.2@62.124,35.661 ; v1(112.065,74.549) 120.142,66.472 120.142,63.5 119.685,63.043 119.685,49.276 120.745,48.216 120.745,37.84 R3C11.2@122.924,35.661 ; R3C13.2@138.124,35.661 136.843,34.38 136.843,32.169 137.135,31.877 141.301,31.877 143.307,33.883 v1(143.307,35.636) ; v1(211.811,38.659) 211.811,37.974 R3C23.2@214.124,35.661
  Bottom Layer w0.254: v1(56.032,73.254) 56.921,74.143 111.658,74.143 v1(112.065,74.549) ; R3C3.2@62.124,35.661 60.833,36.952 60.833,38.811 61.468,39.446 66.04,39.446 66.853,38.633 v1(66.853,35.433) ; R3C11.2@122.924,35.661 121.643,34.38 121.643,32.611 122.374,31.88 126.073,31.88 126.705,32.512 126.705,37.101 129.554,39.95 135.615,39.95 136.677,38.887 136.677,37.108 R3C13.2@138.124,35.661 ; v1(143.307,35.636) 143.307,33.353 144.78,31.88 149.543,31.88 R3C15.2@153.324,35.661 151.816,37.169 151.816,38.684 152.574,39.442 156.464,39.442 159.004,36.902 159.004,32.416 160.048,31.372 162.636,31.372 163.144,31.88 164.743,31.88 R3C17.2@168.524,35.661 167.243,36.942 167.243,39.116 167.569,39.442 171.704,39.442 173.173,37.973 v1(173.685,37.973) ; R3C25.2@229.324,35.661 228.041,34.378 228.041,32.436 228.994,31.483 235.238,31.483 235.349,31.372 240.235,31.372 242.938,34.075 R3C27.2@244.524,35.661 243.484,35.661 v1(242.418,34.595)
NetR3C1_3: R3C1.3 R3C3.3 R3C5.3 R3C7.3 R3C9.3 R3C11.3 R3C13.3 R3C15.3 R3C17.3 R3C19.3 R3C21.3 R3C23.3 R3C25.3 R3C27.3 R15.1 R16.1 | length 405.6
  Top Layer w0.254: v1(115.658,81.636) R15.1@115.658,74.549 R16.1@119.038,74.549
  MidLayer1 w0.254: R3C1.3@46.924,33.161 44.627,35.458 44.627,59.181 67.081,81.636 v1(115.658,81.636) ; R3C9.3@107.724,33.161 109.008,31.877 111.709,31.877 112.725,30.861 117.551,30.861 119.851,33.161 R3C11.3@122.924,33.161 124.713,31.372 134.813,31.372 136.602,33.161 R3C13.3@138.124,33.161
  MidLayer2 w0.254: R3C17.3@168.524,33.161 169.808,31.877 171.704,31.877 172.314,32.487 172.314,39.06 173.204,39.95 180.413,39.95 180.67,39.693 180.67,36.215 R3C19.3@183.724,33.161 185.005,31.88 186.944,31.88 187.505,32.441 187.505,36.509 190.51,39.514 194.564,39.514 195.461,38.617 195.461,35.407 197.707,33.161 R3C21.3@198.924,33.161 200.208,31.877 202.184,31.877 202.717,32.41 202.717,37.059 205.613,39.954 209.906,39.954 210.795,39.065 210.795,36.49 R3C23.3@214.124,33.161 216.424,30.861 227.024,30.861 R3C25.3@229.324,33.161 231.37,31.115 242.478,31.115 R3C27.3@244.524,33.161
  Bottom Layer w0.254: R3C1.3@46.924,33.161 48.208,31.877 50.673,31.877 52.705,33.909 52.705,39.319 53.34,39.954 ; R3C3.3@62.124,33.161 59.588,35.697 59.588,38.608 58.242,39.954 ; R3C9.3@107.724,33.161 104.521,36.364 104.521,39.022 103.593,39.95 99.358,39.95 98.335,38.927 98.335,37.908 96.305,35.878 96.305,32.512 95.673,31.88 93.805,31.88 R3C7.3@92.524,33.161 88.705,36.98 88.705,38.574 88.646,38.633 88.646,39.192 88.392,39.446 84.328,39.446 81.229,36.347 81.229,32.512 80.597,31.88 78.605,31.88 R3C5.3@77.324,33.161 75.692,34.793 75.692,38.278 74.016,39.954 58.242,39.954 ; R3C13.3@138.124,33.161 139.408,31.877 143.185,31.877 143.69,31.372 149.909,31.372 151.698,33.161 R3C15.3@153.324,33.161 155.011,31.474 157.973,31.474 158.583,30.864 163.068,30.864 163.576,31.372 165.109,31.372 166.898,33.161 R3C17.3@168.524,33.161 ; 53.34,39.954 58.242,39.954 ; 53.34,39.954 58.242,39.954
NetR3C1_4: R3C1.4 R3C3.4 R3C5.4 R3C7.4 R3C9.4 R3C11.4 R3C13.4 R3C15.4 R3C17.4 R3C19.4 R3C21.4 R3C23.4 R3C25.4 R3C27.4 R16.2 R17.2 | length 521.8
  Top Layer w0.254: v1(112.573,64.389) 120.738,72.554 ; v1(120.396,71.12) 120.396,72.009 120.738,72.351 ; v1(120.738,71.12) 120.738,72.351 ; 120.738,72.351 120.738,72.554 ; 120.738,72.351 122.936,74.549 ; 120.738,72.554 R16.2@120.738,74.549 ; 120.738,72.554 R16.2@120.738,74.549 ; R16.2@120.738,74.549 122.936,74.549 ; 122.936,74.549 R17.2@124.118,74.549 122.936,74.549
  MidLayer1 w0.254: v1(51.613,40.335) 52.244,40.966 57.077,40.966 57.585,40.458 59.198,40.458 59.321,40.335 62.45,40.335 R3C3.4@64.624,38.161 65.532,38.161 67.833,40.462 71.45,40.462 71.955,39.957 78.028,39.957 R3C5.4@79.824,38.161 81.61,36.375 81.61,33.359 83.597,31.372 88.725,31.372 89.992,32.639 89.992,36.296 91.187,37.49 91.187,39.003 91.631,39.446 93.739,39.446 R3C7.4@95.024,38.161 ; v1(142.977,70.409) 142.977,70.104 141.046,68.174 130.404,68.174 127.864,70.714 127.152,70.714 124.435,67.996 121.322,67.996 120.738,68.58 ; R3C15.4@155.824,38.161 158.138,40.475 168.71,40.475 R3C17.4@171.024,38.161 ; v1(211.404,42.012) 211.008,41.616 202.275,41.616 201.424,40.764 R3C21.4@201.424,38.161 199.123,40.462 190.567,40.462 188.266,38.161 R3C19.4@186.224,38.161 183.415,40.97 173.833,40.97 ; 120.738,68.58 v1(120.738,71.12) 120.738,68.58 ; 120.738,68.58 120.738,66.04 121.363,65.415 149.52,65.415 150.546,64.389 154.098,64.389 155.073,65.364 175.936,65.364 179.908,61.392 179.908,42.393 178.816,41.3 174.163,41.3 173.833,40.97 ; R3C17.4@171.024,38.161 173.833,40.97 ; R3C17.4@171.024,38.161 173.833,40.97
  MidLayer2 w0.254: v1(45.771,71.831) 45.11,71.171 45.11,42.475 R3C1.4@49.424,38.161 51.598,40.335 v1(51.613,40.335) ; R3C9.4@110.224,38.161 112.014,39.951 112.014,63.83 v1(112.573,64.389) ; R3C13.4@140.624,38.161 140.624,38.887 140.487,38.887 140.487,41.148 142.418,43.078 142.418,52.629 142.926,53.137 142.926,64.745 140.767,66.904 140.767,68.199 v1(142.977,70.409) ; v1(211.404,42.012) 212.773,42.012 R3C23.4@216.624,38.161 219.713,41.25 228.735,41.25 R3C25.4@231.824,38.161 234.62,35.365 234.62,34.747 235.636,33.731 235.636,32.464 236.22,31.88 240.109,31.88 241.173,32.944 241.173,38.608 242.214,39.649 245.536,39.649 R3C27.4@247.024,38.161
  Bottom Layer w0.254: v1(45.771,71.831) 48.743,74.803 110.236,74.803 112.141,76.708 118.161,71.12 v1(120.396,71.12) ; R3C11.4@125.424,38.161 126.176,38.913 126.961,38.913 128.511,40.462 138.323,40.462 R3C13.4@140.624,38.161
NetR3C1_5: R3C1.5 R3C3.5 R3C5.5 R3C7.5 R3C9.5 R3C11.5 R3C13.5 R3C15.5 R3C17.5 R3C19.5 R3C21.5 R3C23.5 R3C25.5 R3C27.5 R17.1 R18.1 | length 684.7
  Top Layer w0.254: v1(125.818,73.152) R17.1@125.818,74.549 ; v1(126.416,67.996) v1(126.416,68.428) v1@126.416,73.152 ; v1(141.199,91.161) 129.198,79.16 R18.1@129.198,74.549 127.813,74.549 ; v1(153.238,67.488) 157.093,67.488 158.445,66.136 158.445,41.656 159.512,40.589 164.287,40.589 165.989,38.887 165.989,32.512 167.208,31.293 172.11,31.293 173.33,32.512 v1(173.33,33.355) ; R17.1@125.818,74.549 126.416,74.549 ; R17.1@125.818,74.549 126.416,74.549 ; v1@126.416,73.152 127.813,74.549 ; v1@126.416,73.152 126.416,74.549 ; 126.416,74.549 127.813,74.549
  MidLayer1 w0.254: v1(126.416,68.428) 126.632,68.212 127.279,67.564 v1(142.045,67.564) ; v1(141.199,91.161) 244.45,91.161 248.818,86.792 248.818,42.342 245.923,39.446 ; R3C15.5@155.824,35.661 160.117,39.954 165.989,39.954 166.649,39.294 166.649,33.045 167.815,31.88 171.704,31.88 172.314,32.49 172.314,34.371 ; R3C17.5@171.024,35.661 172.314,34.371 ; v1(173.33,33.355) 172.314,34.371 ; R3C21.5@201.424,35.661 205.205,31.88 209.804,31.88 210.312,32.388 210.312,35.331 212.827,37.846 212.827,38.837 213.432,39.442 217.579,39.442 217.905,39.116 217.905,36.942 R3C23.5@216.624,35.661 221.297,30.988 230.2,30.988 230.327,30.861 246.888,30.861 248.31,32.283 248.31,34.375 R3C27.5@247.024,35.661 248.31,36.947 248.31,39.116 247.98,39.446 245.923,39.446 ; R3C25.5@231.824,35.661 235.609,39.446 ; 235.609,39.446 245.923,39.446 ; 235.609,39.446 245.923,39.446
  MidLayer2 w0.254: R3C1.5@49.424,35.661 52.598,32.487 52.855,32.487 53.464,31.877 57.742,31.877 58.826,32.961 58.826,36.926 61.342,39.442 65.308,39.442 65.913,38.837 65.913,36.95 R3C3.5@64.624,35.661 67.691,32.594 67.691,32.033 68.352,31.372 73.157,31.372 74.651,32.866 74.651,37.897 76.2,39.446 80.45,39.446 81.128,38.768 81.128,36.965 R3C5.5@79.824,35.661 ; R3C9.5@110.224,35.661 113.027,38.464 113.027,40.201 113.284,40.458 119.202,40.458 119.634,40.89 119.634,47.396 119.126,47.904 119.126,64.008 119.634,64.516 119.634,65.913 113.69,71.857 111.074,71.857 109.779,73.152 109.779,79.756 110.236,80.213 111.43,80.213 118.491,73.152 v1(125.818,73.152) ; R3C11.5@125.424,35.661 126.721,36.958 126.721,39.167 125.984,39.903 125.984,41.909 127.737,43.662 127.737,64.491 126.416,65.811 v1(126.416,67.996) ; R3C13.5@140.624,35.661 143.01,38.047 143.178,38.047 143.739,38.608 143.739,48.34 143.184,48.895 143.184,51.943 143.692,52.451 143.692,65.917 v1(142.045,67.564)
  Bottom Layer w0.254: R3C5.5@79.824,35.661 84.205,40.042 95.416,40.03 ; R3C7.5@95.024,35.661 96.317,36.954 96.317,39.141 95.416,40.03 ; R3C9.5@110.224,35.661 111.506,36.943 111.506,39.192 111.252,39.446 106.959,39.446 106.909,39.395 105.156,39.395 104.089,40.462 98.49,40.462 98.058,40.03 95.416,40.03 ; v1(126.416,67.996) 126.924,67.488 142.045,67.488 v1(153.238,67.488) ; v1(173.33,33.355) 173.33,33.045 175.006,31.369 177.648,31.369 178.156,31.877 186.944,31.877 187.528,32.461 187.528,34.357 R3C19.5@186.224,35.661
NetR3C1_6: R3C1.6 R3C3.6 R3C5.6 R3C7.6 R3C9.6 R3C11.6 R3C13.6 R3C15.6 R3C17.6 R3C19.6 R3C21.6 R3C23.6 R3C25.6 R3C27.6 R18.2 R19.2 | length 659.3
  Top Layer w0.254: v1(134.366,82.296) 134.278,82.208 R19.2@134.278,74.549 R18.2@130.898,74.549 130.898,67.273 131.928,66.243 146.279,66.243 150.165,62.357 150.165,41.656 149.098,40.589 ; v1(142.723,39.091) 144.221,40.589 ; v1(151.409,62.357) 150.698,61.646 150.698,41.656 149.631,40.589 149.098,40.589 ; 144.221,40.589 149.098,40.589 ; 144.221,40.589 149.098,40.589
  MidLayer1 w0.254: R3C3.6@64.624,33.161 63.343,31.88 61.468,31.88 60.782,32.566 60.782,36.639 57.979,39.442 56.566,39.442 56.058,39.95 53.638,39.95 51.613,37.925 51.613,35.35 R3C1.6@49.424,33.161 47.53,31.267 44.704,31.267 42.506,33.465 42.506,62.496 62.713,82.702 119.634,82.702 120.04,82.296 v1(134.366,82.296) 135.407,83.337 v1(244.069,83.337) ; v1(173.33,35.89) 173.33,36.085 174.843,37.598 174.843,39.116 175.681,39.954 180.061,39.954 181.229,38.786 181.229,33.844 183.193,31.88 184.943,31.88 R3C19.6@186.224,33.161 188.766,35.703 188.766,37.598 191.118,39.95 193.847,39.95 195.669,38.128 195.669,34.976 197.409,33.236 197.409,32.576 198.489,31.496 199.759,31.496 R3C21.6@201.424,33.161 203.597,30.988 214.451,30.988 R3C23.6@216.624,33.161 ; v1(227.018,33.009) 228.404,31.623 230.286,31.623 R3C25.6@231.824,33.161 233.616,31.369 245.232,31.369 R3C27.6@247.024,33.161
  MidLayer2 w0.254: R3C3.6@64.624,33.161 65.578,32.207 65.84,32.207 67.183,30.864 74.212,30.864 75.225,31.877 78.54,31.877 R3C5.6@79.824,33.161 81.286,31.699 82.192,31.699 83.208,30.683 92.546,30.683 R3C7.6@95.024,33.161 96.317,34.454 96.317,39.141 97.373,40.198 103.947,40.198 104.521,39.624 104.521,34.188 106.829,31.88 108.943,31.88 R3C9.6@110.224,33.161 110.224,34.1 110.49,34.366 110.819,34.366 113.535,37.082 113.535,39.693 113.792,39.95 119.202,39.95 120.123,39.029 120.123,36.902 121.26,35.765 121.26,32.588 121.971,31.877 124.14,31.877 R3C11.6@125.424,33.161 ; v1(151.409,62.357) 151.027,61.975 151.027,32.952 152.483,31.496 154.159,31.496 R3C15.6@155.824,33.161 ; R3C23.6@216.624,33.161 218.413,31.372 225.714,31.372 227.018,32.675 v1(227.018,33.009) ; v1(244.069,83.337) 249.321,78.085 249.321,35.458 R3C27.6@247.024,33.161
  Bottom Layer w0.254: R3C13.6@140.624,33.161 142.291,34.828 142.291,38.659 v1(142.723,39.091) ; R3C17.6@171.024,33.161 173.33,35.467 v1(173.33,35.89)